# Altium PCB ATmega128.PCBDOC
Units mm, origin at the board's own origin, x right, y up, seen from the top; angles counter-clockwise.
Board outline 152.4 x 101.6 mm, 2 copper layers (Top Layer, Bottom Layer); 30 components, 49 nets, 172 pads, 11 vias.
Unrouted connection lines stored in the file: 1.
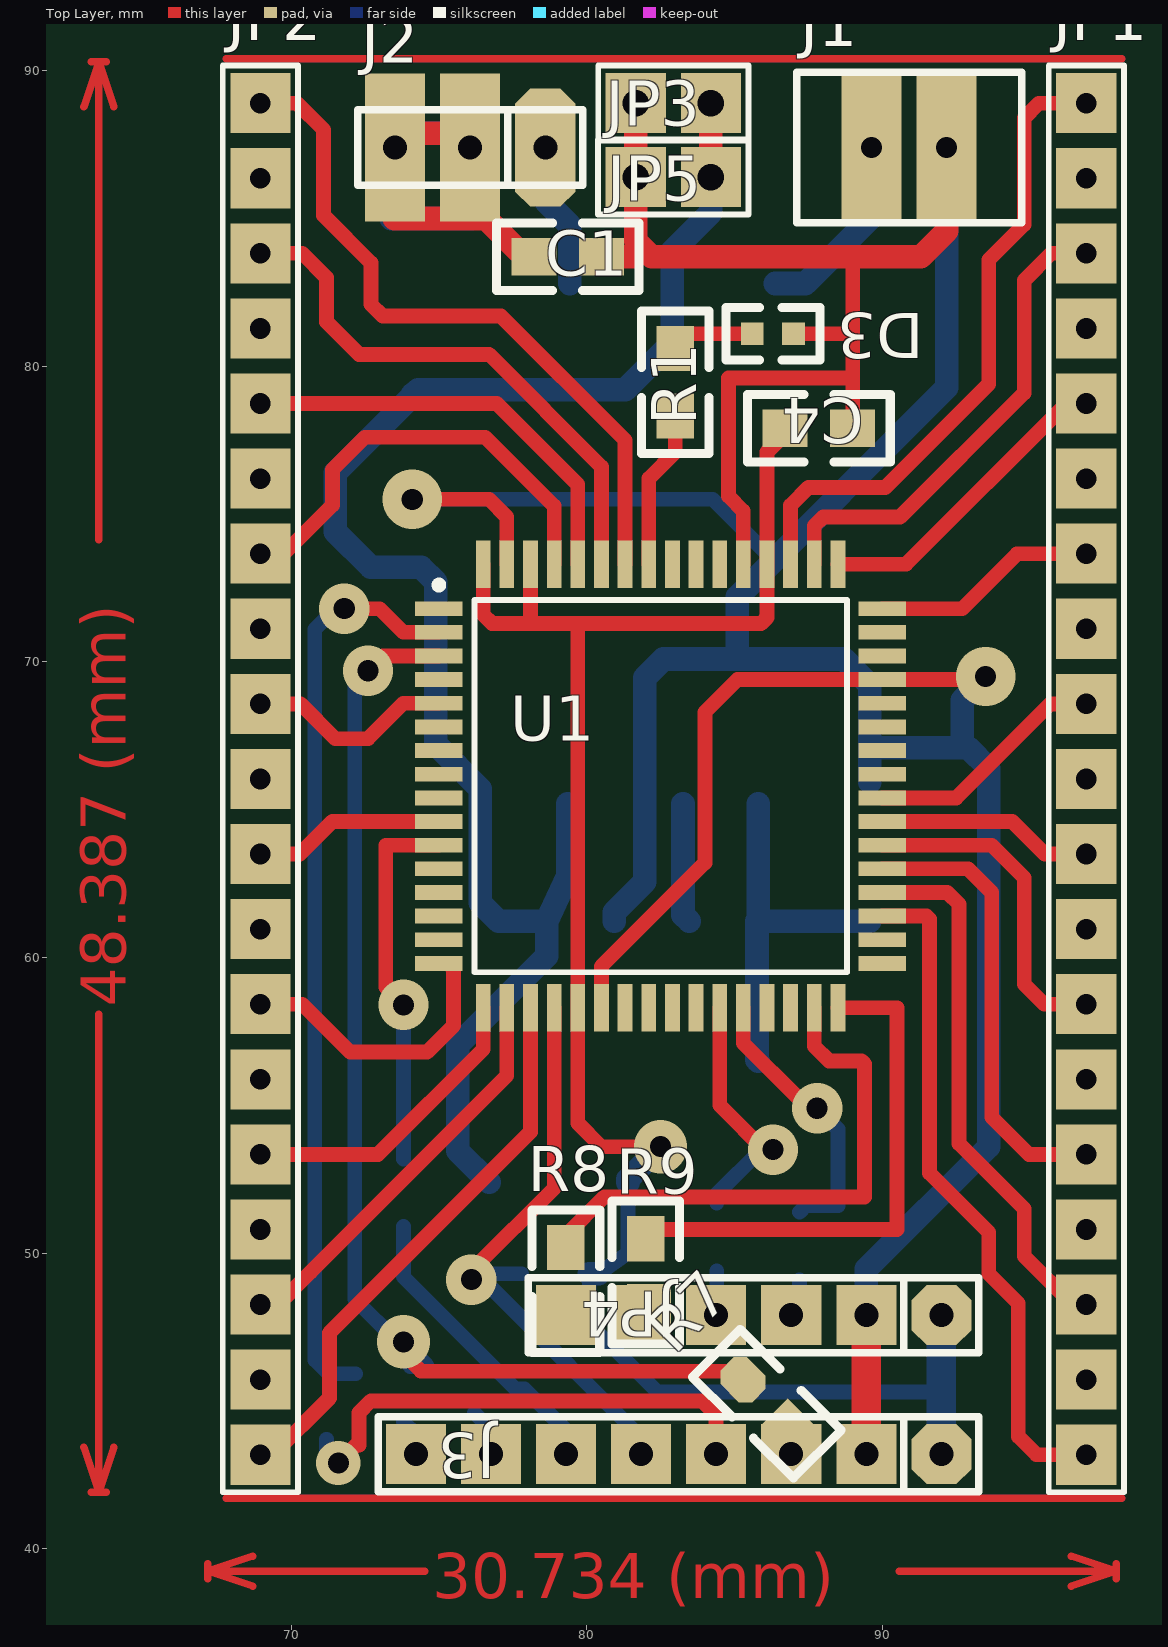
[diagram p0: Top Layer view]
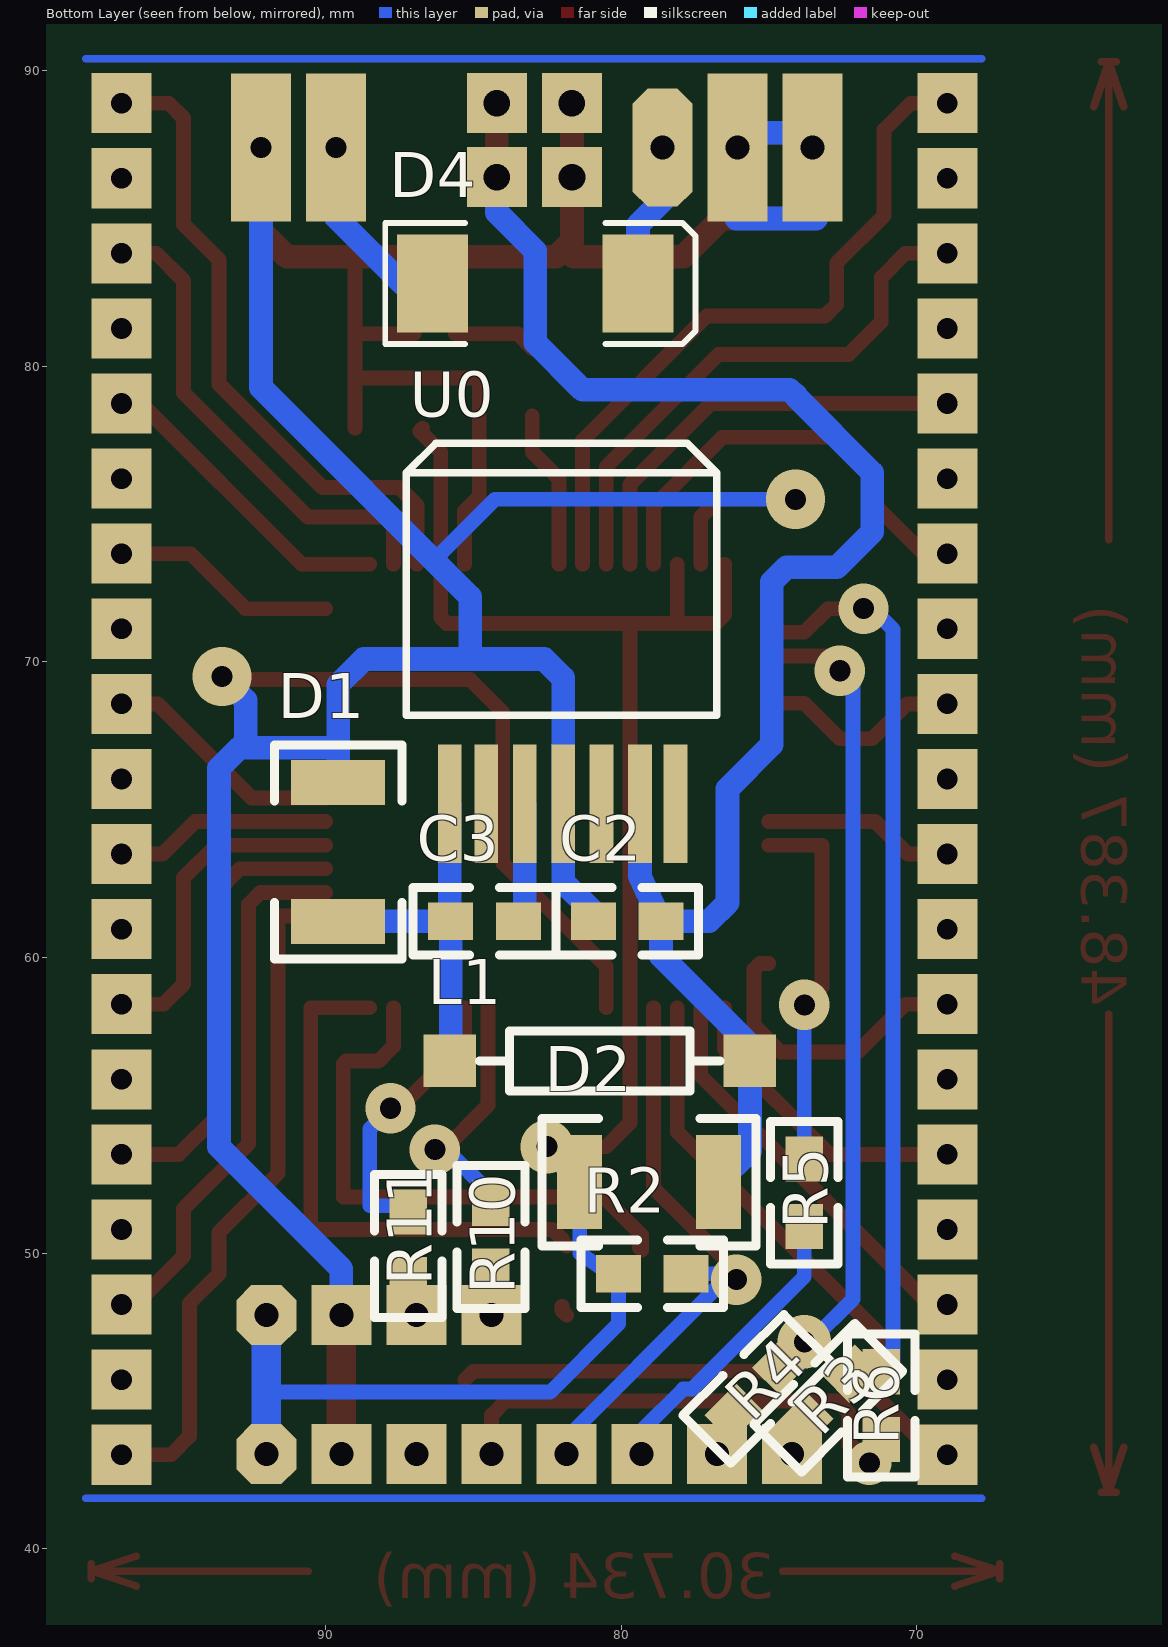
[diagram p1: Bottom Layer view, seen from below]

## Layer stack, top to bottom
Top Layer: signal copper 0.0356
Dielectric: dielectric 0.32, FR-4, Dk 4.8
Bottom Layer: signal copper 0.0356

## Board outline
25.4,25.4 177.8,25.4 177.8,127 25.4,127

## Design rules (kind name [scope] priority, off if disabled: settings)
Clearance [All] p1: gap=0.3
ComponentClearance [All] p1 off: gap=0.254 collisioncheckmode=0
PolygonConnect [All] p1: connectstyle=Relief reliefconductorwidth=0.254 reliefentries=4 polygonreliefangle="90 Angle"
RoutingLayers [All] p1: top layer=Horizontal bottom layer=Vertical
RoutingVias [All] p1: holewidth=0.711 width=1.27 viastyle="Through Hole" minholewidth=0.711 minwidth=1.27 maxholewidth=0.711 maxwidth=1.27
SolderMaskExpansion [All] p1: expansion=0.102
TestPointUsage [All] p1: valid=0 allowmultiple=FALSE
Testpoint [All] p1: side=15 testpointundercomponent=TRUE minsize=1.016 maxsize=2.54 preferedsize=1.524 minholesize=0 maxholesize=1.016 preferedholesize=0.813 testpointgrid=0.025 style=1023 order=1234567890
Width [All] p1: maxlimit=1 minlimit=0.3 preferedwidth=0.3 toplayer_minwidth=0.5 toplayer_prefwidth=0.5 bottomlayer_minwidth=0.5 bottomlayer_prefwidth=0.5 minimp=50.000000 maximp=50.000000 favimp=50.000000
16 further rules are at their usual default settings.

## Components (designator, comment, footprint, x,y, rotation, side; value= is the part's Value field where it differs from the comment)
C1 "100nF" 0805#1 80.5,83.7 r180 top
C2 "100nF" 0805#1 80.936,61.224 r180 bottom
C3 "10nF" 0805#1 83.476,61.224 r0 bottom
C4 "100nF" 0805#1 89,77.9 r180 top
D1 "SR305" 1812 89.572,61.224 r90 bottom
D2 "" 1812 81.4,52.4 r180 bottom
D3 "verte" 0603 85.6,81.1 r0 top
D4 "Diode" DSO-C2/X3.3 82.9,82.8 r180 bottom
J1 "12V" CON2 87.1,87.4 r180 top
J2 "INT" TSIP3 78.6,87.4 r180 top
J3 "TCON8" TSIP8 92,43.2 r180 top
JP1 "Header 19" HDR1X19 96.901,43.18 r90 top
JP2 "Header 19" HDR1X19 68.961,43.18 r90 top
JP3 "Header 2" HDR1X2 84.201,88.9 r180 top
JP4 "Header 6" TSIP6 92,47.9 r180 top
JP5 "Header 2" HDR1X2 84.2,86.4 r180 top
L1 "33uH" TRES 85.8,56.5 r180 bottom
R1 "Res2" 0805#1 83,80.6 r270 top
R2 "Res2" 0805#1 77.8,49.3 r0 bottom
R3 "Res2" 0805#1 73.8,44.3 r135 bottom
R4 "Res2" 0805#1 76.2,44.6 r135 bottom
R5 "Res2" 0805#1 73.8,50.9 r90 bottom
R6 "Res2" 0805#1 71.2,43.7 r90 bottom
R7 "Res2" 0805#2 86.9,44.1 r135 top
R8 "Res2" 0805#1 79.3,47.9 r90 top
R9 "Res2" 0805#1 82,48.2 r90 top
R10 "Res2" 0805#1 84.4,49.4 r90 bottom
R11 "Res2" 0805#1 87.2,49.1 r90 bottom
U0 "LM2676" LM2676 86.8,71.2 r180 bottom
U1 "ATmega128-16AI" 64A 82.5,65.8 r0 top

## Footprints (in the part's own frame and the unit in brackets; to place one, negate y for a bottom-side part, rotate by r counter-clockwise, add the part's x,y. Pads: shape width x height; smd on the part's side, far side on the other; paste and mask are expansions set on the pad)
64A [mm] "QFP; 64 Leads; Body 14 x 14 mm; Pitch 0.8 mm"
  rect 1.6x0.5 smd: 1(-7.5,6) 2(-7.5,5.2) 3(-7.5,4.4) 4(-7.5,3.6) 5(-7.5,2.8) 6(-7.5,2) 7(-7.5,1.2) 8(-7.5,0.4) 9(-7.5,-0.4) 10(-7.5,-1.2) 11(-7.5,-2) 12(-7.5,-2.8) 13(-7.5,-3.6) 14(-7.5,-4.4) 15(-7.5,-5.2) 16(-7.5,-6) 33(7.5,-6) 34(7.5,-5.2) 35(7.5,-4.4) 36(7.5,-3.6) 37(7.5,-2.8) 38(7.5,-2) 39(7.5,-1.2) 40(7.5,-0.4) 41(7.5,0.4) 42(7.5,1.2) 43(7.5,2) 44(7.5,2.8) 45(7.5,3.6) 46(7.5,4.4) 47(7.5,5.2) 48(7.5,6)
  rect 0.5x1.6 smd: 17(-6,-7.5) 18(-5.2,-7.5) 19(-4.4,-7.5) 20(-3.6,-7.5) 21(-2.8,-7.5) 22(-2,-7.5) 23(-1.2,-7.5) 24(-0.4,-7.5) 25(0.4,-7.5) 26(1.2,-7.5) 27(2,-7.5) 28(2.8,-7.5) 29(3.6,-7.5) 30(4.4,-7.5) 31(5.2,-7.5) 32(6,-7.5) 49(6,7.5) 50(5.2,7.5) 51(4.4,7.5) 52(3.6,7.5) 53(2.8,7.5) 54(2,7.5) 55(1.2,7.5) 56(0.4,7.5) 57(-0.4,7.5) 58(-1.2,7.5) 59(-2,7.5) 60(-2.8,7.5) 61(-3.6,7.5) 62(-4.4,7.5) 63(-5.2,7.5) 64(-6,7.5)
  silkscreen extent -7.62,-6.3 6.3,6.92
0603 [mil]
  rect 30x30 smd: 1(0,0) 2(55,0)
  silkscreen extent -35,-35 90,35
0805#1 [mil]
  rect 60x50 smd: 1(0,0) 2(90,0)
  silkscreen extent -50,-45 140,45
0805#2 [mil]
  rect 60x50 smd: 1(0,0)
  oct 60x50 smd: 2(90,0)
  silkscreen extent -50,-45 140,45
1812 [mil]
  rect 60x125 smd: 1(0,0) 2(185,0)
  silkscreen extent -50,-85 235,85
CON2 [mil]
  rect 80x196.85 hole 28: 1(-200,0) 2(-100,0)
  silkscreen extent -300,-100 0,100
DSO-C2/X3.3 [mm]
  rect 2.4x3.3 smd: 1(-3.475,0) 2(3.475,0)
  silkscreen extent -5.07,-2.05 5.43,2.05
HDR1X2 [mil] "Connector; Header; 2 Position"
  rect 80x80 hole 35.43: 1(0,0) 2(100,0)
  silkscreen extent -50,-50 150,50
HDR1X19 [mil] "Connector; Header; 19 Position"
  rect 80x80 hole 27.56: 1(0,0) 2(100,0) 3(200,0) 4(300,0) 5(400,0) 6(500,0) 7(600,0) 8(700,0) 9(800,0) 10(900,0) 11(1000,0) 12(1100,0) 13(1200,0) 14(1300,0) 15(1400,0) 16(1500,0) 17(1600,0) 18(1700,0) 19(1800,0)
  silkscreen extent -50,-50 1850,50
LM2676 [mm]
  rect 0.8x4 smd: 1(1,-6) 2(2.24,-6) 3(3.54,-6) 4(4.84,-6) 5(6.14,-6) 6(7.44,-6) 7(8.64,-6)
  silkscreen extent -0.46,-3 10.04,6.2
TRES [mil]
  rect 70x70 smd: 1(0,0) 2(400,0)
  silkscreen extent 40,-40 360,40
TSIP3 [mil]
  oct 80x157.48 hole 32: 1(0,0)
  rect 80x196.85 hole 32: 2(100,0) 3(200,0)
  silkscreen extent -50,-50 250,50
TSIP6 [mil]
  oct 80x80 hole 32: 1(0,0)
  rect 80x80 hole 32: 2(100,0) 3(200,0) 4(300,0)
  rect 80x80 smd: 5(400,0) 6(500,0)
  silkscreen extent -50,-50 550,50
TSIP8 [mil]
  oct 80x80 hole 32: 1(0,0)
  rect 80x80 hole 32: 2(100,0) 3(200,0) 4(300,0) 5(400,0) 6(500,0) 7(600,0) 8(700,0)
  silkscreen extent -50,-50 750,50

## Part data
C1 C2 C4: library part CAP
C3: library part CONDO
D1 D2: library part DIODE
D3: library part LED
D4: "Default Diode"
J1: library part CON2
J2: library part TCON3
JP1 JP2: "Header, 19-Pin"
JP3 JP5: "Header, 2-Pin"
JP4: "Header, 6-Pin"
L1: library part RES2
R1 R2 R3 R4 R5 R6 R7 R8 R9 R10 R11: "Resistor"
U1: library part ATmega1280

## Via types
v1: diameter 1.7, hole 0.711, Top Layer to Bottom Layer, 6 vias
v2: diameter 2, hole 0.711, Top Layer to Bottom Layer, 2 vias
v3: diameter 1.8, hole 0.711, Top Layer to Bottom Layer, 2 vias
v4: diameter 1.5, hole 0.711, Top Layer to Bottom Layer, 1 vias

## Nets (pads, with @x,y where several pads share a name; then routed paths per layer and width w, separated by ;. In a path a pad name is that pad's centre, name@x,y a point inside that pad or via, vN(x,y) a via of type N, cw(c..) or ccw(c..) an arc to the next point about the centre after c; other vN are vias at no path point)
5V: C4.2 D2.1 J3.1 JP4.1 R2.2 U1.21 U1.52 U1.62 U1.64 | length 74.1
  Top Layer w0.5: U1.64 76.5,71.6 76.8,71.3 85.9,71.3 86.1,71.5 86.1,77.1 86.8,77.8 C4.2@86.8,77.814 ; 78,71.3 78.1,71.4 U1.62 ; 79.7,71.3 79.7,54.4 80.5,53.6 v3(82.5,53.6) ; C4.2@86.8,77.814 C4.2 C4.2@86.8,77.814
  Bottom Layer w0.5: R2.2@80.4,49.3 81.4,50 D2.1 ; 80.086,47.614 82.4,45.3 91.6,45.3 ; 80.086,47.614 R2.2 80.086,47.614 ; 91.6,45.3 92,44.9 91.6,45.3
  Bottom Layer w0.8: R2.2 R2.2@80.4,49.3 ; D2.1 81.4,52.5 v3(82.5,53.6)
  Bottom Layer w1: J3.1 92,44.9 ; J3.1 92,44.9 ; J3.1 JP4.1 92,44.9
/RST: J3.5 R2.1 U1.20 | length 20.9
  Top Layer w0.5: v1(76.1,49.1) 76.2,49 76.2,49.5 78.9,52.2 U1.20
  Bottom Layer w0.5: R2.1 76.3,49.3 v1(76.1,49.1) 76.5,49.1 77.05,48.55 81.84,43.76 J3.5
EN_RX: R8.2 U1.31 | length 18.9
  Top Layer w0.5: R8.2@79.3,50.1 R8.2@79.343,50.143 ; R8.2@79.386,50.186 R8.2 79.3,50.6 80.6,51.9 89.4,51.9 89.4,56.4 89.3,56.5 88.2,56.5 87.7,57 U1.31
EN_TX: R9.2 U1.32 | length 18.4
  Top Layer w0.5: R9.2@81.84,50.24 R9.2@82.043,50.443 ; R9.2 82.314,50.8 90.5,50.8 90.5,58.3 U1.32
GND: C1.1 C2.1 C4.1 D1.2 D3.2 J1.1 J3.2 JP3.2 JP4.2 JP5.2 U0.4 U1.22 U1.45 U1.53 U1.63 | length 200.9
  Top Layer w0.5: v2(74.1,75.5) 76.7,75.5 77.3,74.9 U1.63 ; U1.22 80.5,59.7 84,63.2 84,68.3 85.1,69.4 93.4,69.4 v2(93.5,69.5) ; 84.8,79.6 84.8,75.6 85.3,75.1 ; 84.8,79.6 89,79.6 ; 84.8,79.6 89,79.6 ; 85.3,75.1 U1.53 85.3,75.1 ; 88.9,81.1 D3.2 88.9,81.1 ; 88.9,81.1 89,81 ; 88.9,81.1 89,81 ; C4.1 89,79.6 ; C4.1 89,79.6 ; C4.1 89,81 ; C4.1 89,83.7 89,81 ; 89,79.6 89,81
  Top Layer w0.8: 81.599,83.7 C1.1 81.599,83.7 ; 81.599,83.7 81.9,84 ; 81.599,83.7 81.9,84 ; 81.66,84.24 JP5.2 81.66,84.24 ; 81.66,84.24 81.9,84 ; 81.66,84.24 82.2,83.7 ; 81.66,84.24 81.9,84 ; 81.9,84 82.2,83.7 ; 82.2,83.7 89,83.7 ; 82.2,83.7 89,83.7 ; 82.2,83.7 91.3,83.7 ; 89,83.7 91.3,83.7 ; 91.3,83.7 92.18,84.58 ; 92.18,84.58 J1.1 92.18,84.58 ; JP5.2 JP3.2 JP5.2
  Top Layer w1: J3.2 JP4.2 J3.2
  Bottom Layer w0.3: D1.2@89.572,65.428 D1.2
  Bottom Layer w0.5: v2(74.1,75.5) 84.262,75.5 86.331,73.431 86.377,73.477
  Bottom Layer w0.8: 85.1,70.1 85.1,72.2 92.18,79.28 J1.1 ; JP4.2 89.46,49.46 93.6,53.6 93.6,66.4 92.9,67.1 89.572,67.1 ; D1.2 89.572,69.228 88.7,70.1 82.6,70.1 81.96,69.46 81.96,62.56 C2.1@80.936,61.536 ; 92.7,67.1 92.7,68.7 v2(93.5,69.5) ; C2.1@80.936,61.536 C2.1 C2.1@80.936,61.536
MISO: R4.2 R7.2 U1.3 | length 40.5
  Top Layer w0.5: v1(72.6,69.7) 73.1,70.2 U1.3 ; v3@73.6,46.6 73.8,46.6 74.4,46 85,46 R7.2
  Bottom Layer w0.5: v1(72.6,69.7) 72.155,69.255 72.155,48.445 73.6,47 v3(73.8,47) R4.2 ; v3@73.6,46.6 74.033,46.167 R4.2@74.433,46.167
MOSI: R3.2 R6.2 U1.2 | length 31.1
  Top Layer w0.5: v1(71.8,71.8) 73,71.8 73.8,71 U1.2
  Bottom Layer w0.5: v1(71.8,71.8) 71.5,71.8 70.8,71.1 70.8,46.386 71.27,45.916 R3.2
NetC1_2: C1.2 J2.2 J2.3 U0.2 | length 38.5
  Top Layer w0.8: J2.3@73.5,86.7 J2.3@73.5,85 ; J2.3@73.5,85 74,85 J2.2@76.1,85 ; J2.3@73.5,85 J2.2@76.1,85 ; J2.3@73.5,85 76.5,85 J2.2@76.1,85 ; J2.2@76.1,85 76.1,86.7 J2.2@76.1,85 ; J2.2@76.1,85 76.15,85.05 76.55,85.05 C1.2@77.9,83.7 ; C1.2@77.9,83.7 C1.2 C1.2@77.9,83.7 ; J2.3@73.533,87.884 76.073,87.884 J2.3@73.533,87.884
  Bottom Layer w0.3: J2.3@73.3,87.2 J2.3@73.759,87.658 ; J2.3@73.3,87.2 J2.3@73.759,87.658 ; J2.3@73.3,87.2 74,87.9 J2.3@73.759,87.658
  Bottom Layer w0.8: J2.3@73.3,87.2 73.3,85.2 J2.3@73.394,85.106 ; J2.3@73.394,86.694 J2.3@73.394,85.106 ; J2.2@75.6,87.9 74,87.9 74,87.884 J2.3@74,85 ; J2.3@73.394,85.106 73.394,85 J2.3@73.5,85 ; J2.3@73.394,85.106 J2.3@73.5,85 ; J2.3@73.5,85 J2.3@74,85 ; J2.3@74,85 76.1,85 76.086,87.786 J2.2@76.086,87.871 ; J2.2@76.086,87.871 76.073,87.884 J2.2@76.086,87.871
NetC2_2: C2.2 D2.2 JP3.1 JP5.1 L1.2 U0.6 | length 73.7
  Top Layer w0.8: JP5.1 JP3.1 JP5.1
  Bottom Layer w0.8: 75.64,53.46 L1.2 ; 75.64,53.46 D2.2 75.64,53.46 ; 75.64,53.46 L1.2 ; 75.64,53.46 L1.2@75.64,57.04 ; L1.2 L1.2@75.64,57.04 ; L1.2@75.64,57.04 78.65,60.05 ; 78.65,60.05 C2.2 ; 78.65,60.05 C2.2 ; C2.2 79.36,62.76 ; C2.2 79.36,62.76 ; C2.2 77.024,61.224 76.4,61.848 76.4,65.7 74.9,67.2 74.9,72.7 74.4,73.2 72.7,73.2 71.5,74.4 71.5,76.4 74.1,79 74.1,79.034 74.3,79.2 81.3,79.2 82.9,80.8 82.9,83.9 84.2,85.2 ; 79.36,62.76 U0.6 79.36,62.76 ; 84.2,85.2 JP5.1 84.2,85.2
NetC3_1: C3.1 U0.3 | length 8.1
  Bottom Layer w0.8: C3.1@83.26,61.44 C3.1 C3.1@83.26,61.44 ; C3.1@83.26,61.44 U0.3 C3.1@83.26,61.44
NetC3_2: C3.2 D1.1 L1.1 U0.1 | length 25
  Bottom Layer w0.8: L1.1@85.762,56.538 L1.1 L1.1@85.762,56.538 ; L1.1@85.762,56.538 C3.2 ; L1.1@85.762,56.538 C3.2 ; C3.2 C3.2@85.8,61.262 ; C3.2 C3.2@85.8,61.262 ; C3.2@85.8,61.262 U0.1 C3.2@85.8,61.262 ; C3.2@85.8,61.262 C3.2@85.838,61.224 ; C3.2@85.8,61.262 C3.2@85.838,61.224 ; C3.2@85.838,61.224 D1.1 C3.2@85.838,61.224
NetC5_1: U1.23
NetC6_1: U1.24
NetD3_1: D3.1 R1.1 | length 5.6
  Top Layer w0.5: R1.1@83.5,81.1 R1.1 R1.1@83.5,81.1 ; R1.1@83.5,81.1 D3.1 R1.1@83.5,81.1
NetD4_1: D4.1 J1.2 | length 9.9
  Bottom Layer w0.8: D4.1@87.4,82.8 J1.2@89.64,85.04 ; D4.1@87.4,82.8 D4.1 D4.1@87.4,82.8 ; J1.2@89.64,85.04 J1.2 J1.2@89.64,85.04
NetD4_2: D4.2 J2.1 | length 9.7
  Bottom Layer w0.8: J2.1@78.613,85.587 79.425,84.775 ; J2.1@78.613,85.587 78.613,87.884 J2.1@78.613,85.587 ; 79.425,84.775 D4.2 79.425,84.775
NetJ3_3: J3.3 R7.1
NetJ3_4: J3.4 R6.1 | length 17.4
  Top Layer w0.5: v4@71.6,42.6 71.6,42.8 v4@71.65,42.85 ; v4(71.6,42.9) 72.3,43.6 ; 72.3,43.5 72.3,44.6 72.7,45 83.9,45 84.38,44.52 J3.4
  Bottom Layer w0.5: R6.1 71.2,43.3 v4(71.6,42.9) v4@71.6,42.6
NetJ3_6: J3.6 R5.1 | length 10.2
  Bottom Layer w0.5: R5.1 73.8,49.2 77.6,45.4 77.9,45.4 79.3,44 J3.6
NetJ3_7: J3.7 R4.1 | length 1.6
  Bottom Layer w0.5: R4.1 76.76,44.04 J3.7
NetJ3_8: J3.8 R3.1 | length 1.3
  Bottom Layer w0.5: R3.1 74.22,43.88 J3.8
NetJP4_3: JP4.3 R11.1 | length 1.3
  Bottom Layer w0.5: JP4.3 87.2,48.18 R11.1
NetJP4_4: JP4.4 R10.1 | length 1.5
  Bottom Layer w0.5: JP4.4 84.4,47.92 R10.1
NetJP4_5: JP4.5 R9.1 | length 0.4
  Top Layer w0.5: JP4.5 82,48.06 R9.1
NetJP4_6: JP4.6 R8.1
NetR1_2: R1.2 U1.57 | length 9.5
  Top Layer w0.5: 82.1,76.2 83,77.1 ; 82.1,76.2 U1.57 82.1,76.2 ; 83,77.1 R1.2 83,77.1
RX_RADIO: R10.2 U1.27 | length 9
  Top Layer w0.5: U1.27 84.5,55 86.1,53.4 86.5,53.4 v1(86.3,53.5)
  Bottom Layer w0.5: R10.2 84.4,52 85.9,53.5 v1(86.3,53.5)
SCK: R5.2 U1.11 | length 12.8
  Top Layer w0.5: v1(73.8,58.4) 73.2,59 73.2,63.8 U1.11
  Bottom Layer w0.5: v1@73.7,58.3 v1(73.8,58.4) R5.2
SERVO1: JP2.19 U1.58 | length 29.2
  Top Layer w0.5: 70.2,88.9 71.1,88 71.1,85.1 72.7,83.5 72.7,82.1 73.1,81.7 77.1,81.7 81.3,77.5 ; 70.2,88.9 JP2.19 70.2,88.9 ; 81.3,77.5 U1.58 81.3,77.5
SERVO2: JP2.17 U1.59 | length 23.4
  Top Layer w0.5: 70.38,83.82 71.2,83 71.2,81.5 72.3,80.4 76.7,80.4 80.5,76.6 ; 70.38,83.82 JP2.17 70.38,83.82 ; 80.5,76.6 U1.59 80.5,76.6
SERVO3: JP2.15 U1.60 | length 25.3
  Top Layer w0.5: 76.96,78.74 79.7,76 ; 76.96,78.74 JP2.15 76.96,78.74 ; 79.7,76 U1.60 79.7,76
SERVO4: JP2.13 U1.61 | length 18
  Top Layer w0.5: JP2.13@69.76,73.66 71.4,75.3 71.4,76.5 72.5,77.6 76.569,77.6 78.9,75.269 ; JP2.13@69.76,73.66 JP2.13 JP2.13@69.76,73.66 ; 78.9,75.269 U1.61 78.9,75.269
SERVO5: JP2.11 U1.5 | length 9.6
  Top Layer w0.5: JP2.11 68.981,68.6 JP2.11 ; JP2.11 70.32,68.58 ; JP2.11 70.32,68.58 ; 70.32,68.58 71.5,67.4 72.6,67.4 73.8,68.6 ; 73.8,68.6 U1.5 73.8,68.6
SERVO6: JP2.9 U1.10 | length 11.4
  Top Layer w0.5: 70.3,63.5 71.4,64.6 ; 70.3,63.5 JP2.9 70.3,63.5 ; 71.4,64.6 U1.10 71.4,64.6
SERVO7: JP2.7 U1.16 | length 11.8
  Top Layer w0.5: 70.38,58.42 72,56.8 74.6,56.8 75.5,57.7 75.5,59.6 U1.16@75.3,59.8 ; 70.38,58.42 JP2.7 70.38,58.42 ; U1.16@75.3,59.8 U1.16 U1.16@75.3,59.8
SERVO8: JP2.5 U1.17 | length 15.8
  Top Layer w0.5: 72.94,53.34 76.5,56.9 ; 72.94,53.34 JP2.5 72.94,53.34 ; 76.5,56.9 U1.17 76.5,56.9
SERVO9: JP2.3 U1.18 | length 16.7
  Top Layer w0.5: JP2.3@69.56,48.26 70.664,49.363 77.3,56 ; JP2.3@69.56,48.26 JP2.3 JP2.3@69.56,48.26 ; 77.3,56 U1.18 77.3,56
SERVO10: JP2.1 U1.19 | length 19.2
  Top Layer w0.5: JP2.1 69.38,43.18 71.3,45.1 71.3,47.3 78.1,54.1 U1.19
SERVO11: JP1.1 U1.35 | length 26.1
  Top Layer w0.5: 91.5,61.4 91.6,61.3 91.6,52.7 93.6,50.7 93.6,49.3 94.6,48.3 94.6,43.8 95.22,43.18 ; 91.5,61.4 U1.35 91.5,61.4 ; 95.22,43.18 JP1.1 95.22,43.18
SERVO12: JP1.3 U1.36 | length 21
  Top Layer w0.5: 92.2,62.2 92.6,61.8 92.6,53.7 94.8,51.5 94.8,49.9 JP1.3@96.44,48.26 ; 92.2,62.2 U1.36 92.2,62.2 ; JP1.3@96.44,48.26 JP1.3 JP1.3@96.44,48.26
SERVO13: JP1.5 U1.37 | length 20.2
  Top Layer w0.5: 92.9,63 93.7,62.2 93.7,54.6 94.96,53.34 ; 92.9,63 U1.37 92.9,63 ; 94.96,53.34 JP1.5 94.96,53.34
SERVO14: JP1.7 U1.38 | length 16.4
  Top Layer w0.5: 93.7,63.8 94.8,62.7 94.8,59.1 95.48,58.42 ; 93.7,63.8 U1.38 93.7,63.8 ; 95.48,58.42 JP1.7 95.48,58.42
SERVO15: JP1.9 U1.39 | length 13.2
  Top Layer w0.5: 94.4,64.6 95.5,63.5 ; 94.4,64.6 U1.39 94.4,64.6 ; 95.5,63.5 JP1.9 95.5,63.5
SERVO16: JP1.11 U1.40 | length 11.9
  Top Layer w0.5: 92.5,65.4 95.68,68.58 ; 92.5,65.4 U1.40 92.5,65.4 ; 95.68,68.58 JP1.11 95.68,68.58
SERVO17: JP1.13 U1.48 | length 12.7
  Top Layer w0.5: 92.7,71.8 94.56,73.66 ; 92.7,71.8 U1.48 92.7,71.8 ; 94.56,73.66 JP1.13 94.56,73.66
SERVO18: JP1.15 U1.49 | length 13.6
  Top Layer w0.5: 90.8,73.3 JP1.15@96.24,78.74 ; 90.8,73.3 U1.49 90.8,73.3 ; JP1.15@96.24,78.74 JP1.15 JP1.15@96.24,78.74
SERVO19: JP1.17 U1.50 | length 19
  Top Layer w0.5: 87.7,74.6 88,74.9 90.6,74.9 94.8,79.1 94.8,82.9 95.72,83.82 ; 87.7,74.6 U1.50 87.7,74.6 ; 95.72,83.82 JP1.17 95.72,83.82
SERVO20: JP1.19 U1.51 | length 25.8
  Top Layer w0.5: 86.9,75.3 87.5,75.9 90.1,75.9 93.6,79.4 93.6,83.6 94.8,84.8 94.8,88.4 95.3,88.9 ; 86.9,75.3 U1.51 86.9,75.3 ; 95.3,88.9 JP1.19 95.3,88.9
TX_RADIO: R11.2 U1.28 | length 9.8
  Top Layer w0.5: U1.28 85.3,57.1 87.2,55.2 87.6,55.2 87.8,55 v1(87.8,54.9)
  Bottom Layer w0.5: R11.2 87.414,51.6 88.5,51.6 88.5,54.2 v1(87.8,54.9) v1@88,54.9
pads on no net: JP1.2 JP1.4 JP1.6 JP1.8 JP1.10 JP1.12 JP1.14 JP1.16 JP1.18 JP2.2 JP2.4 JP2.6 JP2.8 JP2.10 JP2.12 JP2.14 JP2.16 JP2.18 U0.5 U0.7 U1.1 U1.4 U1.6 U1.7 U1.8 U1.9 U1.12 U1.13 U1.14 U1.15 U1.25 U1.26 U1.29 U1.30 U1.33 U1.34 U1.41 U1.42 U1.43 U1.44 U1.46 U1.47 U1.54 U1.55 U1.56
copper on no net: | length 61.9
  Top Layer w0.254: 62.992,43.434 63.5,41.91 ; 62.992,88.773 63.5,90.297 ; 63.246,41.91 63.754,41.91 ; 63.246,90.297 63.754,90.297 ; 63.5,58.08 63.5,41.91 ; 63.5,74.127 63.5,90.297 ; 64.008,43.434 63.5,41.91 ; 64.008,88.773 63.5,90.297 ; 67.183,38.989 67.183,39.497 ; 68.707,38.735 67.183,39.243 ; 68.707,39.751 67.183,39.243 ; 74.526,39.243 67.183,39.243 ; 90.574,39.243 97.917,39.243 ; 96.393,38.735 97.917,39.243 ; 96.393,39.751 97.917,39.243 ; 97.917,38.989 97.917,39.497

## Other copper
Top Layer:
  text "48.387 (mm)" at 64.414,58.334 h1.52 r90
  text "30.734 (mm)" at 74.78,38.329 h1.52
Multi-Layer:
  lines w0.254: 67.8,41.7 98.1,41.7 ; 67.8,90.4 98.1,90.4